# Altium PCB vsvsf.PcbDoc
Units mil, origin at the board's own origin, x right, y up, seen from the top; angles counter-clockwise.
Board outline 2512 x 1737 mil, 2 copper layers (Top Layer, Bottom Layer); 30 components, 25 nets, 112 pads, 11 vias.
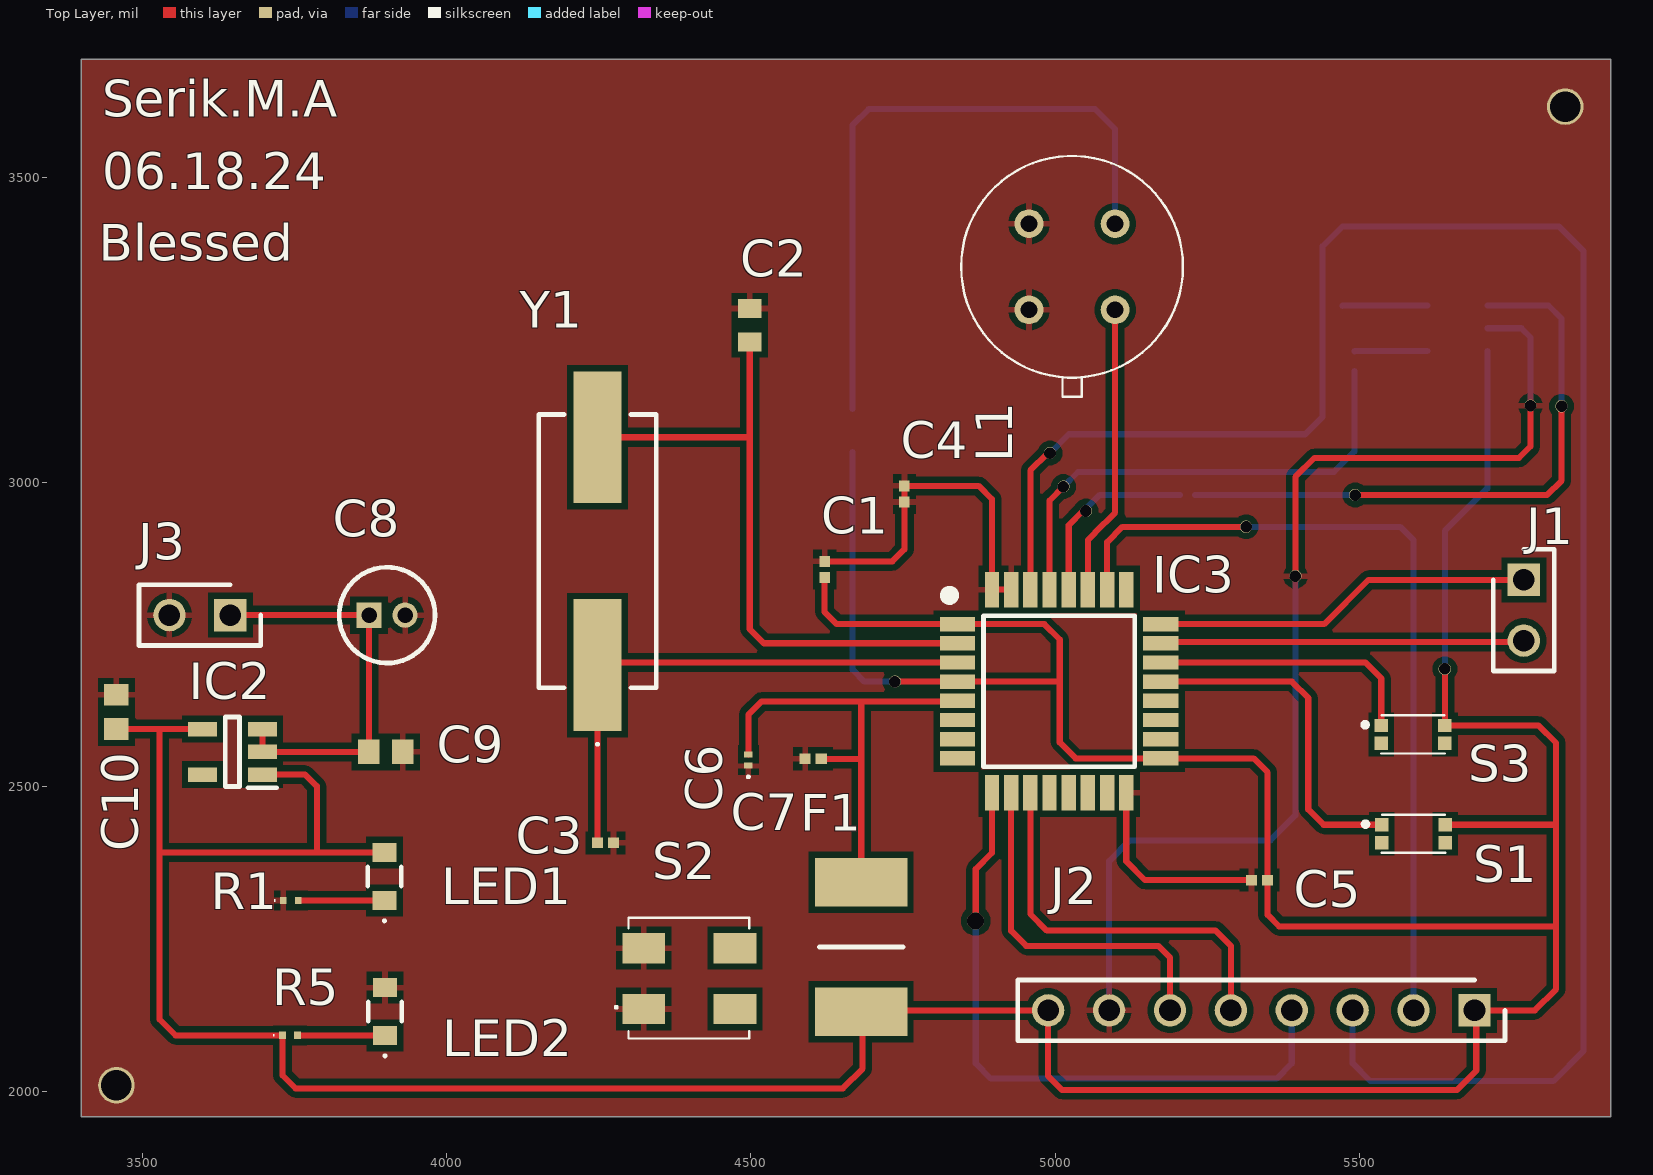
[diagram p0: Top Layer view]
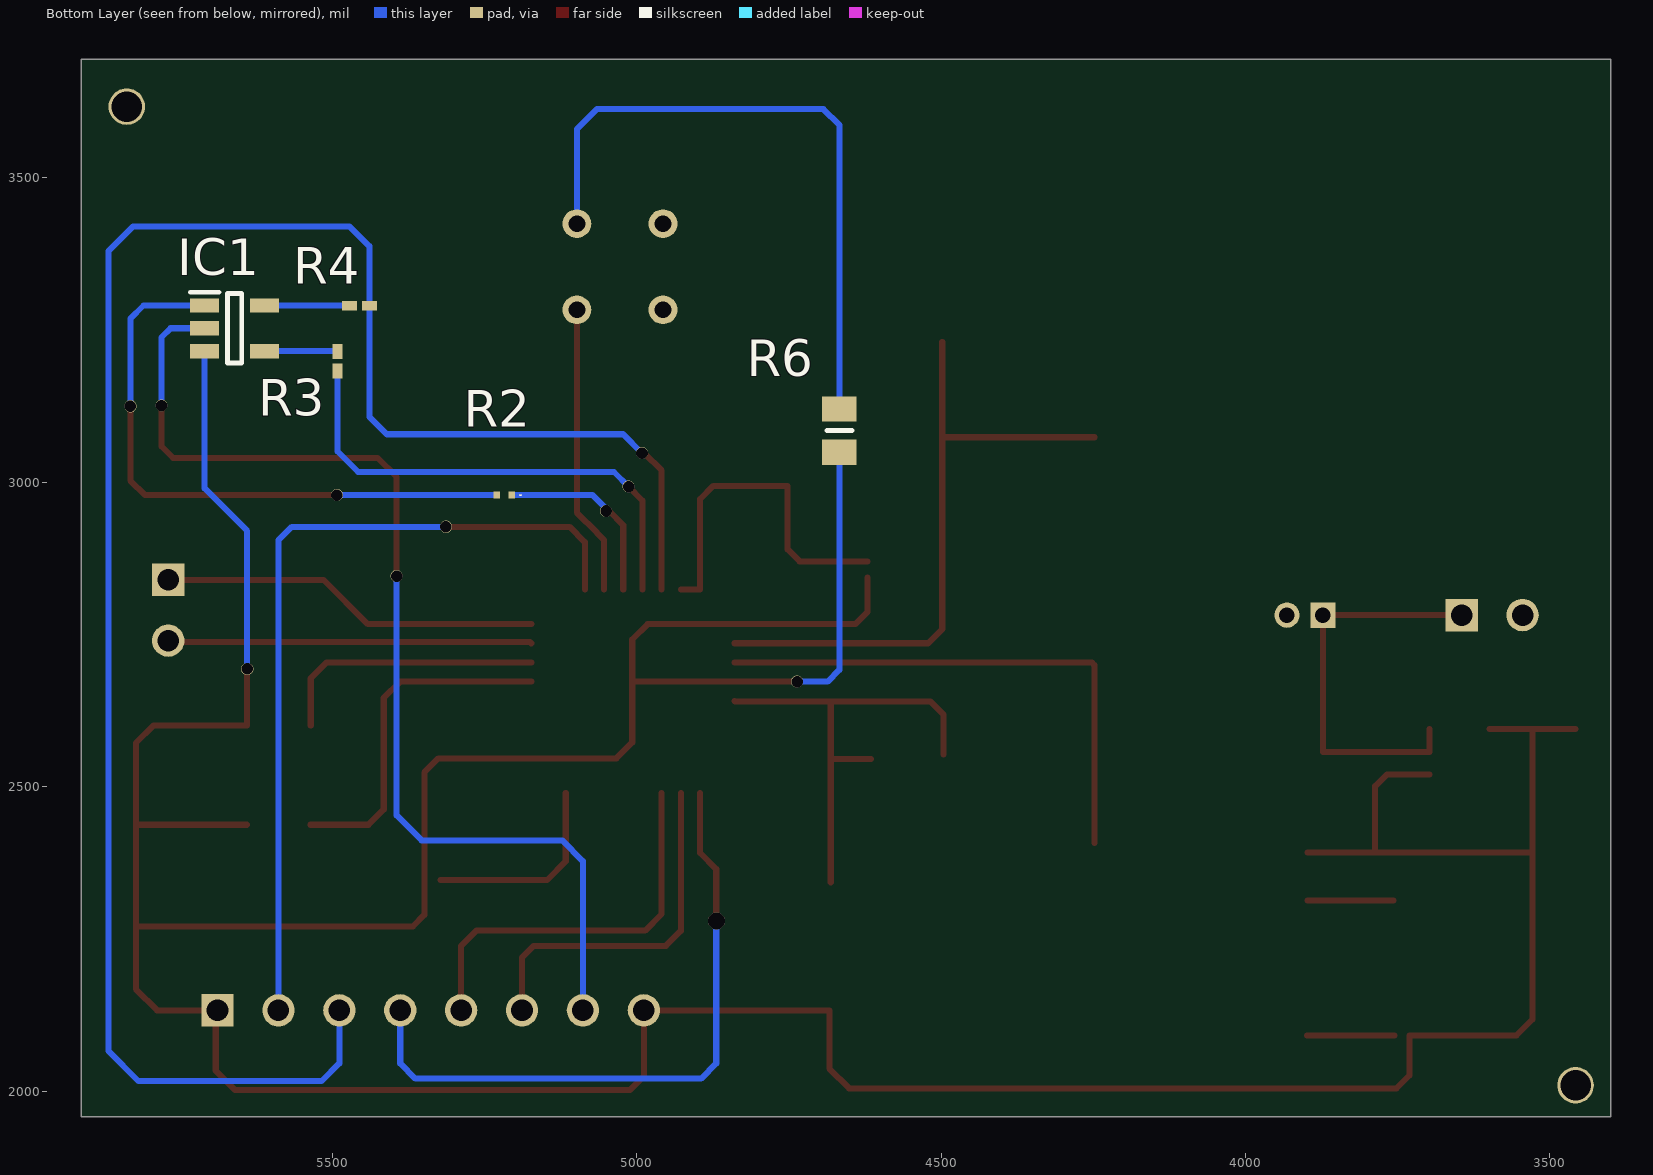
[diagram p1: Bottom Layer view, seen from below]
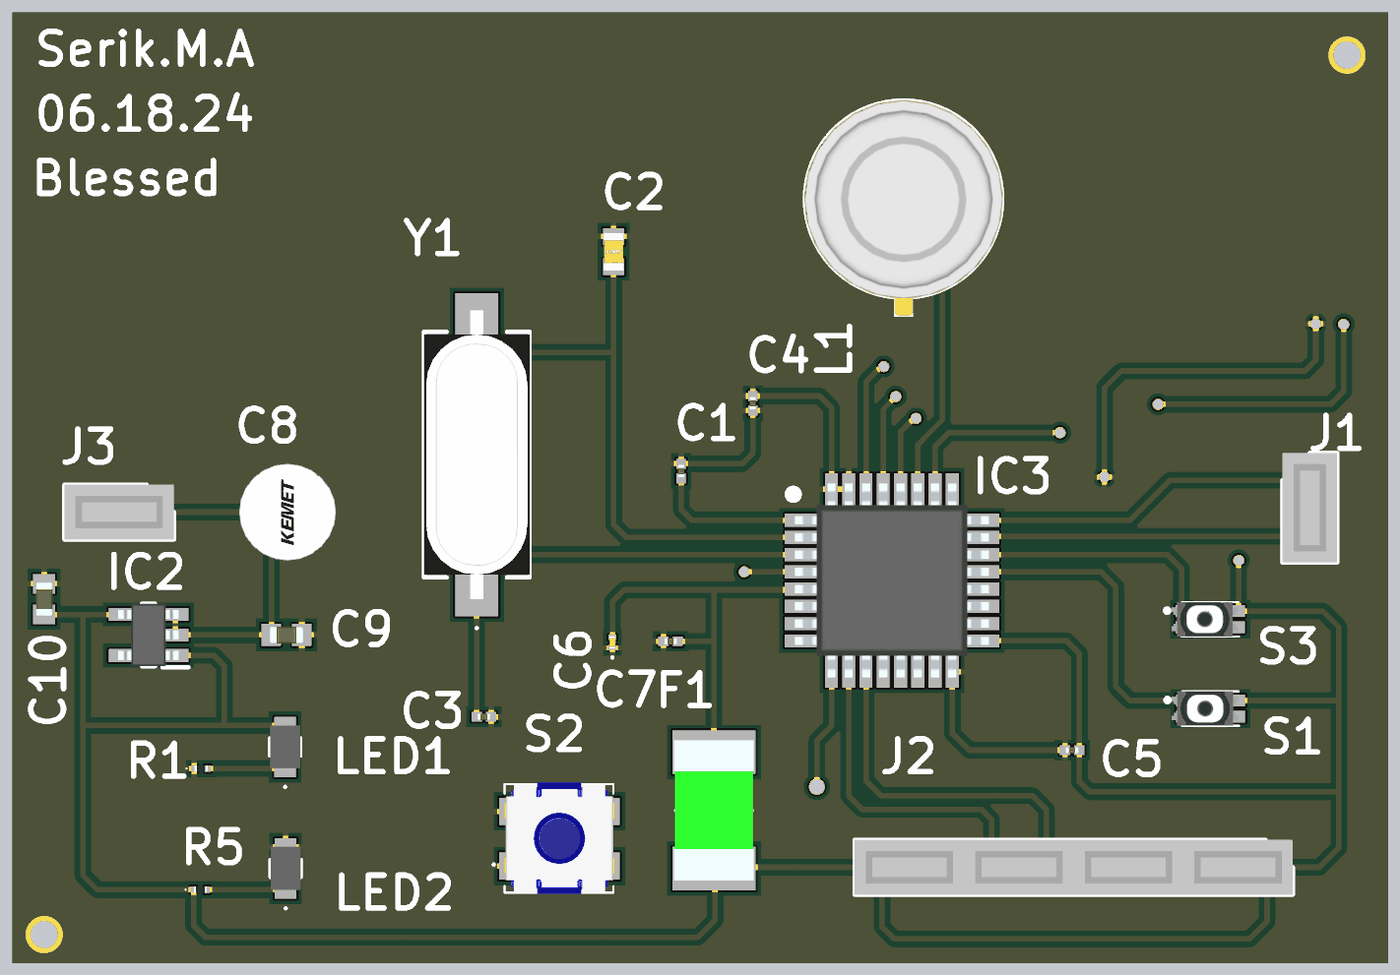
[diagram p2: 3D render of the assembled board from above, using the file's embedded part models]
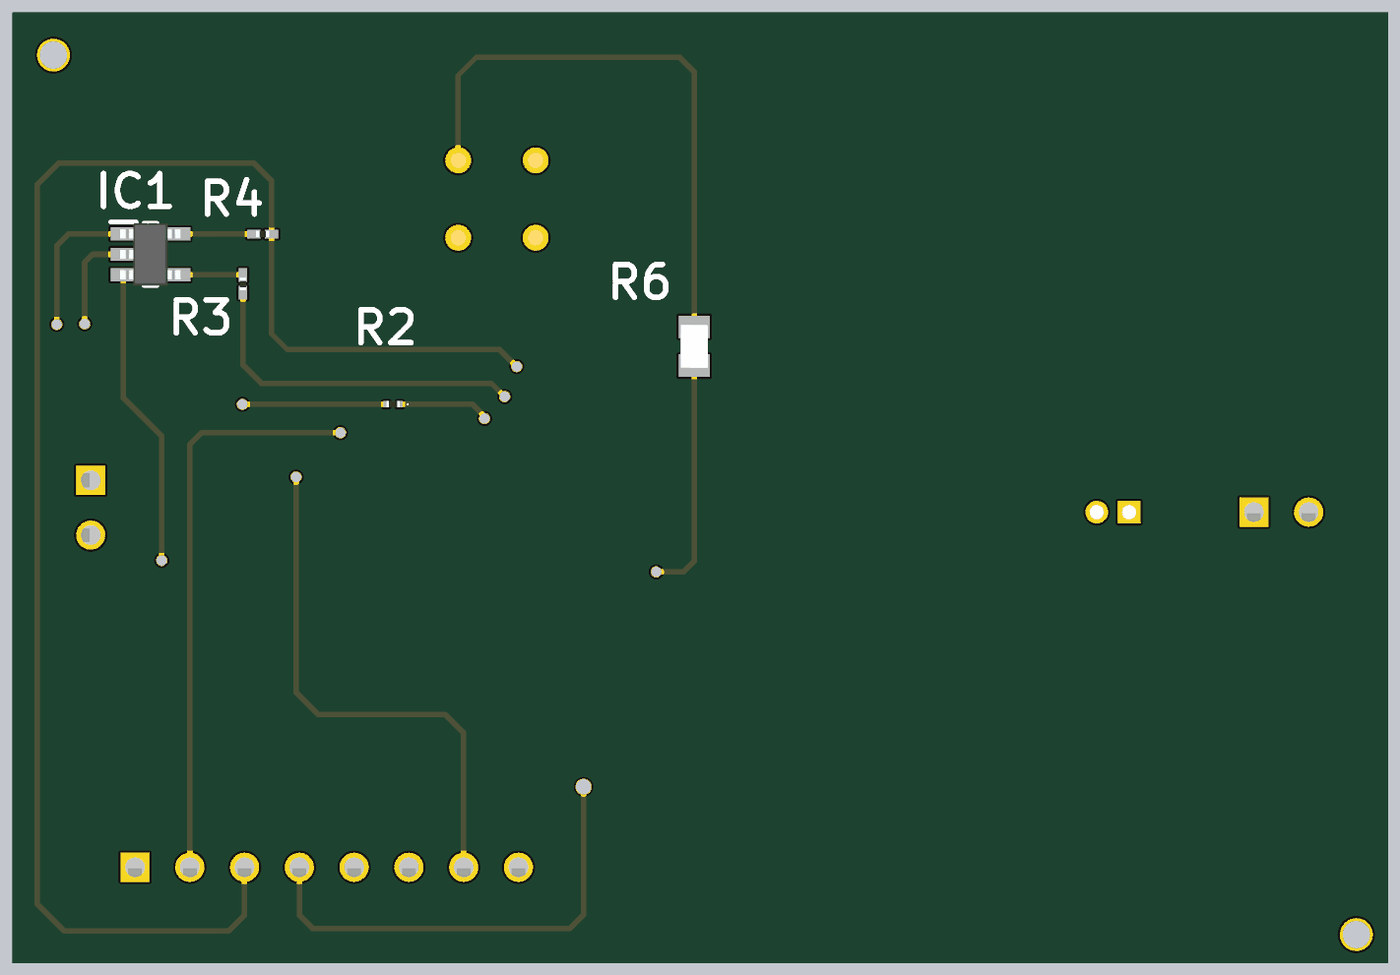
[diagram p3: 3D render of the assembled board from below, using the file's embedded part models]

## Layer stack, top to bottom
Top Solder: solder mask 0.4, Solder Resist, Dk 3.5
Top Layer: signal copper 1.4
Dielectric 1: dielectric 12.6, FR-4, Dk 4.8
Bottom Layer: signal copper 1.4
Bottom Solder: solder mask 0.4, Solder Resist, Dk 3.5

## Board outline
3400,1958 3400,3695 5912,3695 5912,1958
board region "Default Layer Stack Region": 3400,1958 3400,3695 5912,3695 5912,1958
board region "Default Layer Stack Region": 3400,1958 3400,3695 5912,3695 5912,1958
board region "Layer Stack Region 1": 3400,1958 3400,3695 5912,3695 5912,1958

## Design rules (kind name [scope] priority, off if disabled: settings)
Clearance [All] p1: gap=10 ignorepadtopadclearanceinfootprint=FALSE
PolygonConnect [All] p1: connectstyle=Relief reliefconductorwidth=10 reliefentries=4 polygonreliefangle="90 Angle" airgapwidth=10
RoutingVias [All] p1: holewidth=28 width=50 viastyle="Through Hole" minholewidth=28 minwidth=50 maxholewidth=28 maxwidth=50
SolderMaskExpansion [All] p1: expansion=4 istentingtop=FALSE
Width [All] p1: maxlimit=10 minlimit=10 preferedwidth=10
30 further rules are at their usual default settings.

## Classes and differential pairs
component class LastProject: C8 C9 C10 IC1 IC2 J3 LED1 LED2 R1 R2 R3 R4 R5
component class "Last project": C1 C2 C3 C4 C5 C6 C7 F1 IC3 J1 J2 L1 R6 S1 S2 S3 Y1

## Components (designator, comment, footprint, x,y, rotation, side; value= is the part's Value field where it differs from the comment)
C1 "02013D104KAT2A" CAPC0603X33N 4621,2857 r270 top
C2 "C0603C200F5GACTU" CAPC1608X87N 4498,3258 r270 top
C3 "02013D104KAT2A" CAPC0603X33N 4261,2408 r180 top
C4 "02013D104KAT2A" CAPC0603X33N 4752,2981 r270 top
C5 "02013D104KAT2A" CAPC0603X33N 5335,2347 r0 top
C6 "GRM033R61A103MA01D" GRM033D70J224ME01D 4495.67,2544 r90 top
C7 "02016D105MAT2A" CAPC0603X33N 4602,2546 r0 top
C8 "ESS105M050AB2AA" CAPPRD150W45D400H850 3872.89,2781.91 r0 top
C9 "GCJ188C70J475KE02D" CAPC1608X100N 3900.45,2557.5 r0 top
C10 "GCJ188C70J475KE02D" CAPC1608X100N 3458,2623 r90 top
F1 "0157001.DR" FUSC6537X403N 4681,2237 r90 top
IC1 "AD7415ARTZ-0500RL7" SOT95P280X145-5N 5660,3253 r180 bottom
IC2 "MIC5231-5.0YM5-TR" SOT95P280X145-5N 3648.48,2557.5 r180 top
IC3 "STM32L052K6T6" QFP80P900X900X160-32N 5006,2657 r0 top
J1 "90147-1102" RHDR2W70P0X254_1X2_493X244X870P 5769,2840 r270 top
J2 "90147-1108" RHDR8W70P0X254_1X8_2017X244X870P 5688,2133 r180 top
J3 "90147-1102" RHDR2W70P0X254_1X2_493X244X870P 3645,2782 r180 top
L1 "ZTP-115" ZTP115 4956.5,3283.33 r180 top
LED1 "LY_M676-Q2S1-26-Z" LYM676Q2S126Z 3898.09,2352.77 r90 top
LED2 "LY_M676-Q2S1-26-Z" LYM676Q2S126Z 3899,2131 r90 top
R1 "ERJ-1GJF1001C" ERJ1GJJ2R4C 3744.54,2313.4 r0 top
R2 "ERJ-1GJF1001C" ERJ1GJJ2R4C 5217,2979 r0 bottom
R3 "CRCW020110K0FNED" RESC0603X28N 5491,3199 r270 bottom
R4 "CRCW020110K0FNED" RESC0603X28N 5455,3290 r180 bottom
R5 "ERJ-1GJF1001C" ERJ1GJJ2R4C 3743,2092 r0 top
R6 "RN73C2A100KBTDF" RESC2012X65N 4667,3085 r90 bottom
S1 "EVP-BB2A9B000" EVPBB2A9B000 5578,2423 r0 top
S2 "7914J-1-000E" 7914J1000E 4387,2186 r90 top
S3 "EVP-BB2A9B000" EVPBB2A9B000 5577.32,2586.24 r0 top
Y1 "830003151" 830003151 4248,2887.01 r90 top

## Footprints (in the part's own frame and the unit in brackets; to place one, negate y for a bottom-side part, rotate by r counter-clockwise, add the part's x,y. Pads: shape width x height; smd on the part's side, far side on the other; paste and mask are expansions set on the pad)
7914J1000E [mm]
  rect 1.27x1.78 smd: 1(-1.29,1.605) 2(-1.29,-2.205) 3(1.25,1.605) 4(1.25,-2.205)
  silkscreen extent -2.52,-2.8 2.52,2.8, body extent -2.57,-2.85 2.57,2.25, height 4.19
830003151 [mm]
  rect 5.5x2 smd: 1(-4.75,0) 2(4.75,0)
  silkscreen extent -8.1,-2.45 5.7,2.45, body extent -6.7,-2.45 6.7,2.45, height 4.3
CAPC0603X33N [mm]
  rect 0.47x0.44 smd: 1(-0.335,0) 2(0.335,0)
  body extent -0.3,-0.15 0.3,0.15, height 0.33
CAPC1608X87N [mm]
  rect 0.78x0.98 smd: 1(-0.7,0) 2(0.7,0)
  body extent -0.87,-0.48 0.88,0.47, height 0.87
CAPC1608X100N [mm]
  rect 0.9x1.02 smd: 1(-0.71,0) 2(0.71,0)
  body extent -0.8,-0.4 0.8,0.4, height 1
CAPPRD150W45D400H850 [mm]
  rect 1.05x1.05 hole 0.65: 1(0,0)
  round 1.05 hole 0.65: 2(1.5,0)
  silkscreen extent -1.25,-2 2.75,2, body extent -1.5,-2.25 3,2.25, height 8.51
ERJ1GJJ2R4C [mm]
  rect 0.275x0.3 smd: 1(-0.313,0) 2(0.313,0)
  silkscreen extent -0.7,-0.03 -0.65,0.03, body extent -0.3,-0.15 0.3,0.15, height 0.23
EVPBB2A9B000 [mm]
  rect 0.55x0.55 smd: 1(-1.075,0.375) 2(-1.075,-0.375) 3(1.575,-0.375) 4(1.575,0.375)
  silkscreen extent -1.85,-0.8 1.58,0.8, body extent -1.55,-0.8 1.55,0.8, height 0.55
FUSC6537X403N [mm]
  rect 2.02x3.85 smd: 1(-2.7,0) 2(2.7,0)
  silkscreen extent 0,-1.75 0,1.75, body extent -3.25,-1.85 3.25,1.85, height 4.03
GRM033D70J224ME01D [mm]
  rect 0.25x0.35 smd: 1(-0.237,0) 2(0.237,0)
  silkscreen extent -0.75,-0.05 -0.65,0.05, body extent -0.3,-0.15 0.3,0.15, height 0.3
LYM676Q2S126Z [mm]
  rect 0.8x1 smd: 1(-1,0) 2(1,0)
  silkscreen extent -1.9,-0.7 0.4,0.7, body extent -1,-0.7 1,0.7, height 1.5
QFP80P900X900X160-32N [mm]
  rect 1.475x0.6 smd: 1(-4.238,2.8) 2(-4.238,2) 3(-4.238,1.2) 4(-4.238,0.4) 5(-4.238,-0.4) 6(-4.238,-1.2) 7(-4.238,-2) 8(-4.238,-2.8) 17(4.238,-2.8) 18(4.238,-2) 19(4.238,-1.2) 20(4.238,-0.4) 21(4.238,0.4) 22(4.238,1.2) 23(4.238,2) 24(4.238,2.8)
  rect 0.6x1.475 smd: 9(-2.8,-4.238) 10(-2,-4.238) 11(-1.2,-4.238) 12(-0.4,-4.238) 13(0.4,-4.238) 14(1.2,-4.238) 15(2,-4.238) 16(2.8,-4.238) 25(2.8,4.238) 26(2,4.238) 27(1.2,4.238) 28(0.4,4.238) 29(-0.4,4.238) 30(-1.2,4.238) 31(-2,4.238) 32(-2.8,4.238)
  silkscreen extent -4.77,-3.15 3.15,4.2, body extent -4.5,-4.5 4.5,4.5, height 1.6
RESC0603X28N [mm]
  rect 0.625x0.4 smd: 1(-0.412,0) 2(0.412,0)
  body extent -0.3,-0.15 0.3,0.15, height 0.28
RESC2012X65N [mm]
  rect 1.05x1.45 smd: 1(-0.9,0) 2(0.9,0)
  silkscreen extent 0,-0.53 0,0.53, body extent -1,-0.63 1,0.63, height 0.56
RHDR2W70P0X254_1X2_493X244X870P [mm]
  rect 1.35x1.35 hole 0.9: 1(0,0)
  round 1.35 hole 0.9: 2(2.54,0)
  silkscreen extent -1.27,-1.27 3.81,1.27, body extent -1.27,-1.27 3.81,1.27, height 8.55
RHDR8W70P0X254_1X8_2017X244X870P [mm]
  rect 1.35x1.35 hole 0.9: 1(0,0)
  round 1.35 hole 0.9: 2(2.54,0) 3(5.08,0) 4(7.62,0) 5(10.16,0) 6(12.7,0) 7(15.24,0) 8(17.78,0)
  silkscreen extent -1.27,-1.27 19.05,1.27, body extent -1.27,-1.27 19.05,1.27, height 8.55
SOT95P280X145-5N [mm]
  rect 1.2x0.6 smd: 1(-1.25,0.95) 2(-1.25,0) 3(-1.25,-0.95) 4(1.25,-0.95) 5(1.25,0.95)
  silkscreen extent -1.85,-1.45 0.3,1.5, body extent -1.4,-1.45 1.4,1.45, height 1.45
ZTP115 [mm]
  round 1.2 hole 0.7: 1(0,0) 2(-3.592,0) 3(0,-3.592) 4(-3.592,-3.592)
  silkscreen extent -6.42,-6.42 2.83,3.63, body extent -6.42,-6.4 2.82,3.62, height 3.75

## Part data
C1 C3 C4 C5: "Capacitor", Manufacturer_Name="Kyocera AVX", Mouser Part Number=581-02013D104KAT2A, Datasheet Link=http://www.mouser.com/catalog/supplier/library/pdf/AVXSurfaceMountCeramic.pdf, Height=0.33mm, Manufacturer_Part_Number=02013D104KAT2A, Mouser Price/Stock=https://www.mouser.co.uk/ProductDetail/KYOCERA-AVX/02013D104KAT2A?qs=%252BdQmOuGyFcEnhMAg1ZoBSQ%3D%3D
C2: "Capacitor", Manufacturer_Name=KEMET, Mouser Part Number=80-C0603C200F5GACTU, Arrow Part Number=C0603C200F5GACTU, Arrow Price/Stock=https://www.arrow.com/en/products/c0603c200f5gactu/kemet-corporation, Datasheet Link=https://content.kemet.com/datasheets/KEM_C1003_C0G_SMD.pdf, Height=0.87mm, Manufacturer_Part_Number=C0603C200F5GACTU, Mouser Price/Stock=https://www.mouser.co.uk/ProductDetail/KEMET/C0603C200F5GACTU?qs=gt1LBUVyoHmxLY5yAwiOrg%3D%3D
C6: "Capacitor", Manufacturer_Name="Murata Electronics", Mouser Part Number=81-GRM033R61A103MA1D, Arrow Part Number=GRM033R61A103MA01D, Arrow Price/Stock=https://www.arrow.com/en/products/grm033r61a103ma01d/murata-manufacturing, Datasheet Link=https://search.murata.co.jp/Ceramy/image/img/A01X/G101/ENG/GRM033R61A103MA01-01A.pdf, Height=0.5mm, Manufacturer_Part_Number=GRM033R61A103MA01D, Mouser Price/Stock=https://www.mouser.com/Search/Refine.aspx?Keyword=81-GRM033R61A103MA1D
C7: "Capacitor", Manufacturer_Name="Kyocera AVX", Mouser Part Number=581-02016D105MAT2A, Arrow Part Number=02016D105MAT2A, Arrow Price/Stock=https://www.arrow.com/en/products/02016d105mat2a/avx?region=nac, Datasheet Link=http://www.mouser.com/catalog/supplier/library/pdf/AVXSurfaceMountCeramic.pdf, Height=0.33mm, Manufacturer_Part_Number=02016D105MAT2A, Mouser Price/Stock=https://www.mouser.co.uk/ProductDetail/KYOCERA-AVX/02016D105MAT2A?qs=RC%2FTMc7rOJYRv3ejaJ2Ykg%3D%3D
C8: "Capacitor Polarised", Manufacturer_Name=KEMET, Mouser Part Number=80-ESS105M050AB2AA, Datasheet Link=https://content.kemet.com/datasheets/KEM_A4057_ESS.pdf, Height=8.5mm, Manufacturer_Part_Number=ESS105M050AB2AA, Mouser Price/Stock=https://www.mouser.co.uk/ProductDetail/KEMET/ESS105M050AB2AA?qs=gt1LBUVyoHk47Kt2aLnHUQ%3D%3D
C9 C10: "Capacitor", Manufacturer_Name="Murata Electronics", Mouser Part Number=81-GCJ188C70J475KE2D, Arrow Part Number=GCJ188C70J475KE02D, Arrow Price/Stock=https://www.arrow.com/en/products/gcj188c70j475ke02d/murata-manufacturing?region=nac, Datasheet Link=https://psearch.en.murata.com/capacitor/product/GCJ188C70J475KE02%23.html, Height=1mm, Manufacturer_Part_Number=GCJ188C70J475KE02D, Mouser Price/Stock=https://www.mouser.co.uk/ProductDetail/Murata-Electronics/GCJ188C70J475KE02D?qs=QzBtWTOodeVfJR8CElrI4A%3D%3D
F1: "Fuse", Manufacturer_Name=LITTELFUSE, Mouser Part Number=576-0157001.DR, Arrow Part Number=0157001.DR, Arrow Price/Stock=https://www.arrow.com/en/products/0157001.dr/littelfuse?region=nac, Datasheet Link=https://m.littelfuse.com/~/media/electronics/datasheets/fuses/littelfuse_fuse_157_datasheet.pdf.pdf, Height=4.03mm, Manufacturer_Part_Number=0157001.DR, Mouser Price/Stock=https://www.mouser.co.uk/ProductDetail/Littelfuse/0157001.DR?qs=n5MbhIql%252BRnvbSAA7u9U9A%3D%3D
IC1: "Integrated Circuit", Manufacturer_Name="Analog Devices", Mouser Part Number=584-AD7415ARTZ0500R7, Arrow Part Number=AD7415ARTZ-0500RL7, Arrow Price/Stock=https://www.arrow.com/en/products/ad7415artz-0500rl7/analog-devices?region=nac, Datasheet Link=https://www.analog.com/AD7415/datasheet, Height=1.45mm, Manufacturer_Part_Number=AD7415ARTZ-0500RL7, Mouser Price/Stock=https://www.mouser.co.uk/ProductDetail/Analog-Devices/AD7415ARTZ-0500RL7?qs=NmRFExCfTkFziIEXjMqLhQ%3D%3D
IC2: "Integrated Circuit", Manufacturer_Name=Microchip, Mouser Part Number=998-MIC5231-5.0YM5TR, Arrow Part Number=MIC5231-5.0YM5-TR, Arrow Price/Stock=https://www.arrow.com/en/products/mic5231-5.0ym5-tr/microchip-technology?region=nac, Datasheet Link=http://www.microchip.com/mymicrochip/filehandler.aspx?ddocname=en579721, Height=1.45mm, Manufacturer_Part_Number=MIC5231-5.0YM5-TR, Mouser Price/Stock=https://www.mouser.co.uk/ProductDetail/Microchip-Technology-Atmel/MIC5231-5.0YM5-TR?qs=U6T8BxXiZAXU7aRj5PQ2zw%3D%3D
IC3: "Integrated Circuit", Manufacturer_Name=STMicroelectronics, Mouser Part Number=511-STM32L052K6T6, Arrow Part Number=STM32L052K6T6, Arrow Price/Stock=https://www.arrow.com/en/products/stm32l052k6t6/stmicroelectronics, Datasheet Link=https://www.st.com/resource/en/datasheet/stm32l052k6.pdf, Height=1.6mm, Manufacturer_Part_Number=STM32L052K6T6, Mouser Price/Stock=https://www.mouser.co.uk/ProductDetail/STMicroelectronics/STM32L052K6T6?qs=s5SkPsIz108xCpQ1lakLfA%3D%3D
J1 J3: "Connector", Manufacturer_Name=Molex, Mouser Part Number=538-90147-1102, Datasheet Link=https://componentsearchengine.com/Datasheets/1/90147-1102.pdf, Height=8.7mm, Manufacturer_Part_Number=90147-1102, Mouser Price/Stock=https://www.mouser.co.uk/ProductDetail/Molex/90147-1102?qs=QESXi79X%252BKphYEszDmsGRw%3D%3D
J2: "Connector", Manufacturer_Name=Molex, Mouser Part Number=538-90147-1108, Datasheet Link=https://www.molex.com/pdm_docs/sd/901471102_sd.pdf, Height=8.7mm, Manufacturer_Part_Number=90147-1108, Mouser Price/Stock=https://www.mouser.co.uk/ProductDetail/Molex/90147-1108?qs=QESXi79X%252BKqiwXr7kUdEeg%3D%3D
L1: "Inductor", Manufacturer_Name=Amphenol, Mouser Part Number=527-ZTP-115-STD, Arrow Part Number=ZTP-115, Arrow Price/Stock=https://www.arrow.com/en/products/ztp-115/amphenol, Datasheet Link=https://datasheet.datasheetarchive.com/originals/distributors/DKDS-11/209215.pdf, Height=3.75mm, Manufacturer_Part_Number=ZTP-115, Mouser Price/Stock=https://www.mouser.co.uk/ProductDetail/Amphenol-Advanced-Sensors/ZTP-115?qs=gBjjYPXQNsSHNPW3cDJJRQ%3D%3D
LED1 LED2: "LED", Manufacturer_Name="ams OSRAM", Manufacturer_Part_Number="LY M676-Q2S1-26-Z", Mouser Part Number=720-LYM676Q2S126Z, Datasheet Link=https://www.mouser.com/datasheet/2/588/Osram_7222021_LY__M676_EN-2891431.pdf, Height=1.4mm, Mouser Price/Stock=https://www.mouser.co.uk/ProductDetail/ams-OSRAM/LY-M676-Q2S1-26-Z?qs=nTDll3UaDK64U7BuhoNaqQ%3D%3D
R1 R2 R5: "Resistor", Manufacturer_Name=Panasonic, Mouser Part Number=667-ERJ-1GJF1001C, Arrow Part Number=ERJ-1GJF1001C, Arrow Price/Stock=https://www.arrow.com/en/products/erj-1gjf1001c/panasonic?region=nac, Datasheet Link=https://industrial.panasonic.com/cdbs/www-data/pdf/RDA0000/AOA0000C304.pdf, Height=0.26mm, Manufacturer_Part_Number=ERJ-1GJF1001C, Mouser Price/Stock=https://www.mouser.co.uk/ProductDetail/Panasonic/ERJ-1GJF1001C?qs=OcgtsXO%252B3guJUjvXwXq4eA%3D%3D
R3 R4: "Resistor", Manufacturer_Name=Vishay, Mouser Part Number=71-CRCW0201-10K, Arrow Part Number=CRCW020110K0FNED, Arrow Price/Stock=https://www.arrow.com/en/products/crcw020110k0fned/vishay?region=nac, Datasheet Link=http://www.vishay.com/docs/20035/dcrcwe3.pdf, Height=0.28mm, Manufacturer_Part_Number=CRCW020110K0FNED, Mouser Price/Stock=https://www.mouser.co.uk/ProductDetail/Vishay-Dale/CRCW020110K0FNED?qs=IQLUlsvFoXuh7T4rhkKYcQ%3D%3D
R6: "Resistor", Manufacturer_Name="TE Connectivity", Mouser Part Number=279-RN73CA-100K, Arrow Part Number=RN73C2A100KBTDF, Arrow Price/Stock=https://www.arrow.com/en/products/rn73c2a100kbtdf/te-connectivity, Datasheet Link=https://www.te.com/commerce/DocumentDelivery/DDEController?Action=srchrtrv&DocNm=8-1773459-4_ELEVATOR_ESCALATOR_SOLUTIONS&DocType=Data%20Sheet&DocLang=English&PartCntxt=1676142-2&DocFormat=pdf, Height=0.65mm, Manufacturer_Part_Number=RN73C2A100KBTDF, Mouser Price/Stock=https://www.mouser.co.uk/ProductDetail/TE-Connectivity-Holsworthy/RN73C2A100KBTDF?qs=b4vKS93X7SxCHHLyClRFsA%3D%3D
S1 S3: "Switch", Manufacturer_Name=Panasonic, Mouser Part Number=667-EVP-BB2A9B000, Arrow Part Number=EVP-BB2A9B000, Arrow Price/Stock=https://www.arrow.com/en/products/evp-bb2a9b000/panasonic?region=nac, Datasheet Link=https://industrial.panasonic.com/ac/cdn/e/control/switch/light-touch/catalog/sw_lt_eng_2616s.pdf, Height=0mm, Manufacturer_Part_Number=EVP-BB2A9B000, Mouser Price/Stock=https://www.mouser.co.uk/ProductDetail/Panasonic/EVP-BB2A9B000?qs=iHX4uCgIbgPa3HqgzZ6vLw%3D%3D
S2: "Switch", Manufacturer_Name=Bourns, Mouser Part Number=652-7914J-1-000E, Arrow Part Number=7914J-1-000E, Arrow Price/Stock=https://www.arrow.com/en/products/7914j-1-000e/bourns?region=europe, Datasheet Link=http://www.bourns.com/docs/Product-Datasheets/7914.pdf, Height=4mm, Manufacturer_Part_Number=7914J-1-000E, Mouser Price/Stock=https://www.mouser.co.uk/ProductDetail/Bourns/7914J-1-000E?qs=kSSonJSvPGpYnPbRlGle1w%3D%3D
Y1: "Crystal or Oscillator", Manufacturer_Name="Wurth Elektronik", Mouser Part Number=710-830003151, Datasheet Link=https://www.we-online.com/catalog/datasheet/830003151.pdf, Height=4.3mm, Manufacturer_Part_Number=830003151, Mouser Price/Stock=https://www.mouser.co.uk/ProductDetail/Wurth-Elektronik/830003151?qs=2WXlatMagcHisY7XHApyYg%3D%3D

## Free pads (board coordinates)
  round 60 hole 50: 10(3458,2010) 10(5837,3617)

## Via types
v1: diameter 20, hole 19, Top Layer to Bottom Layer, 10 vias
v2: diameter 28, hole 28, Top Layer to Bottom Layer, 1 vias

## Nets (pads, with @x,y where several pads share a name; then routed paths per layer and width w, separated by ;. In a path a pad name is that pad's centre, name@x,y a point inside that pad or via, vN(x,y) a via of type N, cw(c..) or ccw(c..) an arc to the next point about the centre after c; other vN are vias at no path point)
3.3v: C1.2 C5.2 C10.1 F1.1 IC1.3 IC2.1 IC2.4 IC3.1 IC3.4 IC3.17 J2.1 J2.8 LED1.2 R5.1 R6.1 S1.4 S3.4 | length 7767.7
  Top Layer w10: C10.1 3458.15,2594.9 3528.71,2594.9 ; IC2.4 3528.71,2594.9 ; IC2.1 3767.91,2520.09 3787,2501 3787,2392.14 ; LED1.2 3787,2392.14 ; C1.2 4621,2787 4640.76,2767.24 IC3.1 4981.76,2767.24 5007,2742 5007,2673 ; v1@4736,2673 v1(4736.25,2672.75) IC3.4 5006.75,2672.75 5007,2673 ; v1(5639.33,2693.67) S3.4 5793,2601 5822,2572 5822,2438 ; S1.4 5821.76,2437.76 5822,2438 ; 3528.71,2392 3528.71,2594.9 ; 3528.71,2392 3528.71,2118.29 3555,2092 R5.1 3730.68,2026.32 3752,2005 4651,2005 4683.3,2037.3 4683.3,2133 J2.8 4988,2025 5011,2002 5659,2002 5691,2034 5691,2130 J2.1 5787,2133 5822,2168 5822,2271 ; 3528.71,2392 3528.85,2392.14 3787,2392.14 ; 5007,2673 5007,2573 5033.24,2546.76 IC3.17 5325.24,2546.76 5348.19,2523.81 C5.2 5348.19,2289.81 5367,2271 5822,2271 ; 5822,2271 5822,2438
  Bottom Layer w10: R6.1 4667,2692 4686.25,2672.75 v1(4736.25,2672.75) ; v1(5639.33,2693.67) 5639.33,2920.33 5709.21,2990.21 IC1.3
A0: IC3.9 J2.4 | length 1081.9
  Top Layer w10: v2(4869,2280) 4869,2365 4895.76,2391.76 IC3.9
  Bottom Layer w10: v2(4869,2280) 4869,2046 4894,2021 5363,2021 5388,2046 J2.4
CS: IC3.10 J2.6 | length 592.3
  Top Layer w10: IC3.10 4927.26,2263.74 4952,2239 5169,2239 5188,2220 J2.6
GND: C1.1 C2.1 C3.1 C4.1 C4.2 C5.1 C6.1 C7.1 C8.2 C9.2 C10.2 IC1.2 IC3.16 IC3.31 IC3.32 J2.7 J3.2 L1.1 L1.3 LED2.2 R1.1 S2.1 S2.3 | length 2707.6
  Top Layer w10: C1.1 4732.19,2870.19 4752,2890 C4.2 C4.1 4873.81,2994.19 4895.76,2972.24 IC3.32 IC3.31 ; IC3.16 5116.24,2377.76 5147,2347 C5.1 ; v1(5394,2846) 5394,3009 5425,3040 5761,3040 5780,3059 v1(5780,3126)
  Bottom Layer w10: J2.7 5088,2378 5122,2412 5353,2412 5394,2453 v1(5394,2846) ; IC1.2 5765,3253 5780,3238 v1(5780,3126)
NetC2_2: C2.2 IC3.2 Y1.2 | length 1072.2
  Top Layer w10: Y1.2 4497.98,3074.02 ; C2.2 4498,3074 ; IC3.2 4521.26,2735.74 4498,2759 4498,3074
NetC3_2: C3.2 IC3.3 Y1.1 | length 885
  Top Layer w10: C3.2 4247.81,2699.81 Y1.1 4252.24,2704.24 IC3.3
NetC6_2: C6.2 C7.2 F1.2 IC3.5 | length 780.7
  Top Layer w10: C6.2 4495.67,2618.67 4517,2640 4681,2640 ; C7.2 4681,2546 ; F1.2 4681,2546 ; IC3.5 4837.9,2640 4681,2640 ; 4681,2546 4681,2640
NetC8_1: C8.1 C9.1 IC2.2 IC2.3 J3.1 | length 664.7
  Top Layer w10: J3.1 3872.8,2782 C8.1 3872.89,2557.89 C9.1 IC2.2 IC2.3
NetIC1_1: IC1.1 R2.2 | length 1008.3
  Top Layer w10: v1(5492,2979) 5807,2979 5831,3003 v1(5831,3125)
  Bottom Layer w10: R2.2 v1(5492,2979) ; IC1.1 5809.6,3290.4 5831,3269 v1(5831,3125)
NetIC1_4: IC1.4 R3.1 | length 119.9
  Bottom Layer w10: R3.1 5491.19,3215.41 5610.6,3215.41 IC1.4
NetIC1_5: IC1.5 R4.1 | length 139.7
  Bottom Layer w10: R4.1 5471.42,3290.2 5610.59,3290.2 IC1.5
NetIC3_21: IC3.21 S1.1 | length 568.1
  Top Layer w10: IC3.21@5173.36,2673.26 IC3.21 5388.25,2672.75 5415,2646 5415,2463 5440.24,2437.76 S1.1
NetIC3_22: IC3.22 S3.1 | length 450
  Top Layer w10: IC3.22 5508.76,2704.24 5535,2678 S3.1
NetIC3_27: IC3.27 L1.2 | length 478
  Top Layer w10: IC3.27 5053.24,2905.24 5064.74,2916.74 5064.74,2917.02 5097.91,2950.2 L1.2
NetIC3_28: IC3.28 R2.1 | length 311.4
  Top Layer w10: IC3.28 5021.75,2929.62 5045.13,2953 v1(5050,2953)
  Bottom Layer w10: v1(5050,2953) 5050,2956.92 5072.08,2979 R2.1
NetIC3_29: IC3.29 R3.2 | length 812.4
  Top Layer w10: IC3.29 4990.25,2970.25 v1(5013,2993)
  Bottom Layer w10: v1(5013,2993) 5037,3017 5457,3017 5491,3051 R3.2
NetL1_4: L1.4 R6.2 | length 1077.2
  Bottom Layer w10: R6.2 4667,3587 4693,3613 5065,3613 5097.91,3580.09 L1.4
NetLED1_1: LED1.1 R1.2 | length 141.2
  Top Layer w10: R1.2 LED1.1
NetLED2_1: LED2.1 R5.2 | length 143.8
  Top Layer w10: R5.2 3898.63,2092 LED2.1
NewNet: 
RESET: IC3.11 J2.5 | length 655.8
  Top Layer w10: IC3.11 4958.76,2291.24 4986,2264 5263,2264 5288,2239 J2.5
SCK: IC3.26 J2.2 | length 1372.7
  Top Layer w10: IC3.26 5084.74,2901.74 5110,2927 v1(5313,2927)
  Bottom Layer w10: v1(5313,2927) 5566,2927 5588,2905 J2.2
SDA: IC3.30 J2.3 R4.2 | length 3264.9
  Top Layer w10: IC3.30 4958.76,3019.76 4987,3048 v1(4991,3048)
  Bottom Layer w10: v1@4993.08,3048 v1(4991,3048) 5022,3079 5410,3079 5438.78,3107.78 R4.2 5438.78,3387.78 5471,3420 5827,3420 5867,3380 5867,2066 5818,2017 5517,2017 5488,2046 J2.3
SWCLK: IC3.24 J1.1 | length 626.3
  Top Layer w10: IC3.24 5441.24,2767.24 5514,2840 J1.1
SWDIO: IC3.23 J1.2 | length 597.9
  Top Layer w10: IC3.23 5174.98,2737.87 5766.87,2737.87 J1.2
pads on no net: IC2.5 IC3.6 IC3.7 IC3.8 IC3.12 IC3.13 IC3.14 IC3.15 IC3.18 IC3.19 IC3.20 IC3.25 S1.2 S1.3 S2.2 S2.4 S3.2 S3.3

## Polygon pours and split planes (outlines as drawn)
GND on Drill Guide (solid): 3400,3695 3400,1958 5912,1958 5912,3695
GND on Top Layer "GND_L01_P000" (solid, pour order 0): 3400,3695 5912,3695 5912,1958 3400,1958

## Silkscreen, mask and mechanical layers (free items; w line width, h text height)
Top Overlay:
  text "Serik.M.A" at 3435,3600 h60
  text "06.18.24" at 3435,3481 h60
  text "Blessed" at 3429,3364 h60
Mechanical 4:
  the board outline again, w10